# Altium PCB Sampler_4HP.PCBDOC (part 4 of 6)
Units mm, origin at the board's own origin, x right, y up, seen from the top; angles counter-clockwise.
Board outline 159.99 x 100 mm, 4 copper layers (Top, GP1(GND), L3, Bot), stack 1.648 mm thick; 546 components, 321 nets, 1657 pads, 795 vias.
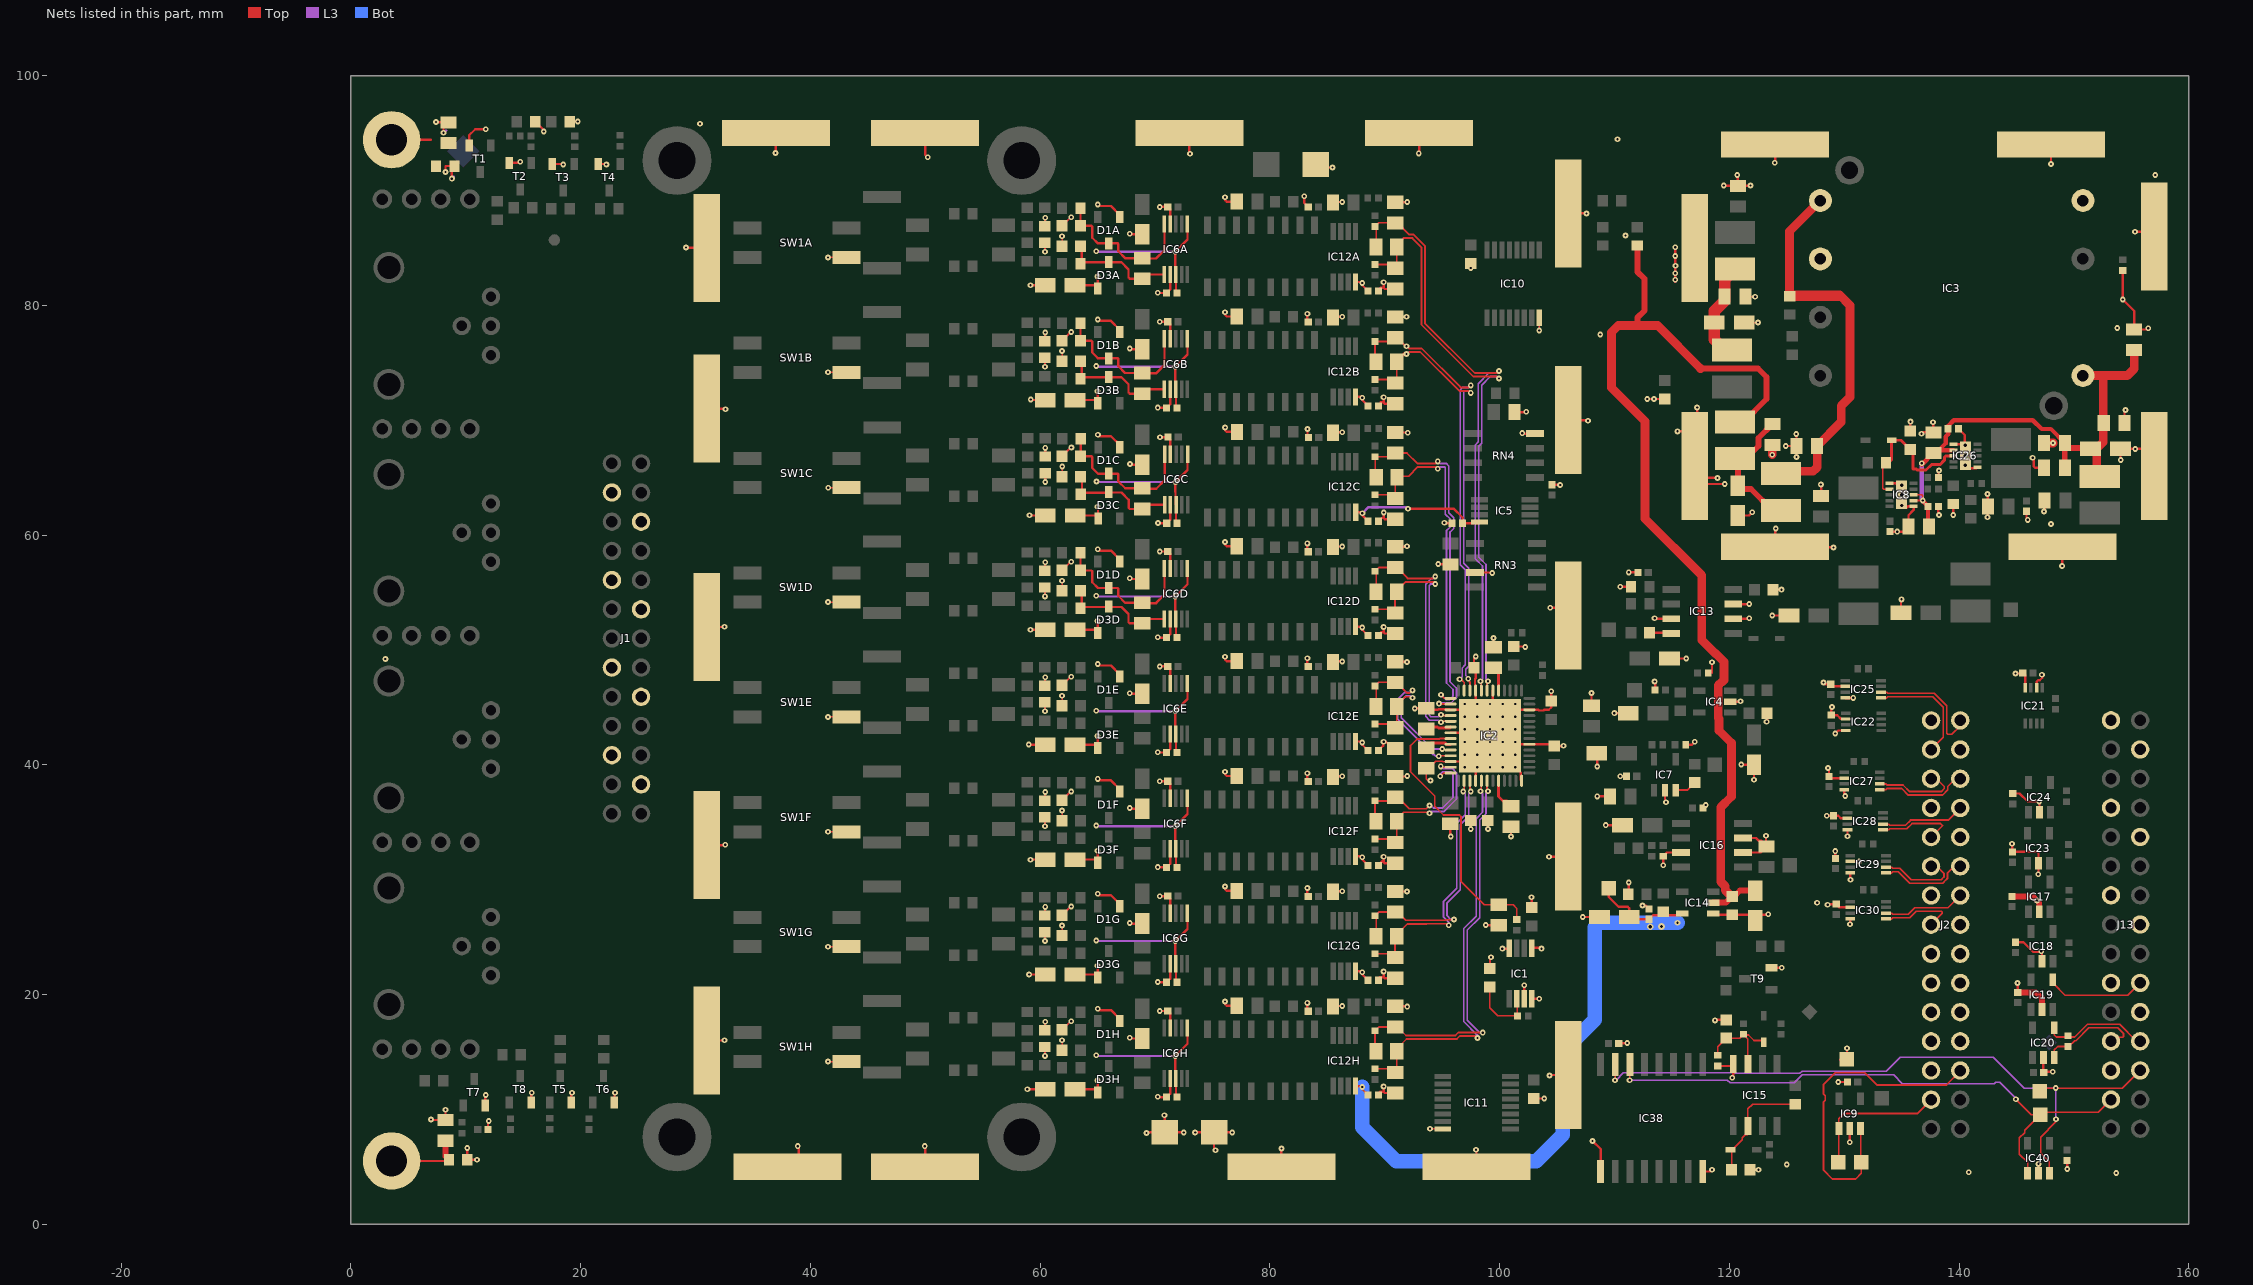
[diagram p5: the nets of this part, all layers, seen from the top]

## Via types
v1: diameter 0.5, hole 0.2, Top to Bot, tented both sides, 760 vias
v2: diameter 0.6, hole 0.3, Top to Bot, tented both sides, 15 vias
v3: diameter 1, hole 0.6, Top to Bot, tented both sides, 8 vias
v4: diameter 0.5, hole 0.2, Top to Bot, 6 vias
v5: diameter 0.6, hole 0.3, Top to Bot, 6 vias

## Nets (pads, with @x,y where several pads share a name; then routed paths per layer and width w, separated by ;. In a path a pad name is that pad's centre, name@x,y a point inside that pad or via, vN(x,y) a via of type N, cw(c..) or ccw(c..) an arc to the next point about the centre after c; other vN are vias at no path point) (continued)
EEM0_6_P: IC19.4 J13.20 | length 8.4
  Top w0.152: IC19.4@148.236,20.927 149.224,19.939 154.694,19.939 J13.20@155.77,21.015
EEM0_7_N: IC20.4 J13.24 R40.1 | length 9.3
  Top w0.152: IC20.4@148.294,17.124 148.294,16.479 148.464,16.309 150.083,16.309 151.183,17.409 153.981,17.409 155.455,15.935 J13.24@155.77,15.935
EEM0_7_P: IC20.3 J13.23 R40.2 | length 9.2
  Top w0.152: IC20.3@148.294,14.524 148.294,15.19 148.584,15.48 R40.2@149.5,15.48 149.565,15.48 150.06,15.975 150.18,15.975 151.309,17.104 153.818,17.104 154.328,16.595 154.328,16.373 154.239,16.284 153.579,16.284 J13.23@153.23,15.935
EEM1_0_N: IC25.5 J2.3 | length 10
  Top w0.152: IC25.5@133.202,45.825 133.703,45.825 133.801,45.923 137.702,45.923 138.625,45 138.625,42.384 J2.3@137.567,41.326
EEM1_0_P: IC25.6 J2.2 | length 10.6
  Top w0.152: IC25.6@133.202,46.325 133.703,46.325 133.801,46.227 137.829,46.227 138.93,45.126 138.93,42.745 139.025,42.65 139.375,42.65 140.107,43.382 J2.2@140.107,43.866
EEM1_1_N: IC27.5 J2.6 | length 8
  Top w0.152: IC27.5@133.106,37.836 133.608,37.836 133.705,37.933 135.001,37.933 135.574,37.361 138.563,37.361 139.016,37.814 139.016,38.111 139.691,38.786 J2.6@140.107,38.786
EEM1_1_P: IC27.6 J2.5 | length 7.6
  Top w0.152: IC27.6@133.106,38.336 133.608,38.336 133.705,38.238 135.127,38.238 135.7,37.666 138.436,37.666 138.711,37.941 138.711,38.111 138.036,38.786 J2.5@137.567,38.786
EEM1_2_N: IC28.5 J2.9 | length 6.9
  Top w0.152: IC28.5@133.386,34.336 133.888,34.336 133.985,34.433 135.463,34.433 135.91,34.881 138.391,34.881 138.566,34.706 J2.9@137.567,33.706
EEM1_2_P: IC28.6 J2.8 | length 7.4
  Top w0.152: IC28.6@133.386,34.836 133.888,34.836 133.985,34.738 135.336,34.738 135.784,35.186 139.046,35.186 J2.8@140.107,36.246
EEM1_3_N: IC29.5 J2.12 | length 7.8
  Top w0.152: IC29.5@133.636,30.586 134.138,30.586 134.235,30.683 134.711,30.683 135.709,29.686 138.567,29.686 138.902,30.02 138.991,30.11 138.991,30.561 139.596,31.166 J2.12@140.107,31.166
EEM1_3_P: IC29.6 J2.11 | length 7.3
  Top w0.152: IC29.6@133.636,31.086 134.138,31.086 134.235,30.988 134.838,30.988 135.835,29.991 138.441,29.991 138.686,30.236 138.686,30.561 138.081,31.166 J2.11@137.567,31.166
EEM1_4_N: IC30.5 J2.15 | length 6.7
  Top w0.152: IC30.5@133.636,26.586 134.138,26.586 134.235,26.683 135.713,26.683 136.285,27.256 138.466,27.256 138.541,27.181 138.541,27.061 J2.15@137.567,26.086
EEM1_4_P: IC30.6 J2.14 | length 7.2
  Top w0.152: IC30.6@133.636,27.086 134.138,27.086 134.235,26.988 135.586,26.988 136.159,27.561 139.041,27.561 J2.14@140.107,28.626
EEM1_5_N: J2.18
EEM1_5_P: J2.17
EEM1_6_N: J2.21
EEM1_6_P: J2.20
EEM1_7_N: J2.24
EEM1_7_P: J2.23
GND: C1.1 C2.1 C3.1 C4.1 C5.1 C6.1 C7.1 C8.1 C9.1 C10A.2 C10B.2 C10C.2 C10D.2 C10E.2 C10F.2 C10G.2 C10H.2 C11A.1 C11B.1 C11C.1 C11D.1 C11E.1 C11F.1 C11G.1 C11H.1 C12.1 C13.1 C14.1 C15.1 C16.1 C18.1 C19.1 C20.1 C21.1 C22.1 C23A.1 C23B.1 C23C.1 C23D.1 C23E.1 C23F.1 C23G.1 C23H.1 C24.1 C25A.2 C25B.2 C25C.2 C25D.2 C25E.2 C25F.2 C25G.2 C25H.2 C26.1 C27.1 C28.2 C29.1 C30.1 C31.1 C32.1 C33.1 C34.1 C35A.1 C35B.1 C35C.1 C35D.1 C35E.1 C35F.1 C35G.1 C35H.1 C36.1 C37.1 C38.1 C39.1 C40.1 C41A.1 C41B.1 C41C.1 C41D.1 C41E.1 C41F.1 C41G.1 C41H.1 C42.1 C43.1 C44.1 C45.1 C46.1 C48.1 C49.2 C50.2 C51.2 C52.1 C53.1 C54.1 C55.1 C56.2 C57.1 C58.1 C59.1 C60.2 C61.1 C62.1 C63.1 C64.1 C66.1 C67.1 C68.1 C69.1 C70A.1 C70B.1 C70C.1 C70D.1 C70E.1 C70F.1 C70G.1 C70H.1 C71A.1 C71B.1 C71C.1 C71D.1 C71E.1 C71F.1 C71G.1 C71H.1 C73A.1 C73B.1 C73C.1 C73D.1 C73E.1 C73F.1 C73G.1 C73H.1 C74A.1 C74B.1 C74C.1 C74D.1 C74E.1 C74F.1 C74G.1 C74H.1 C75.1 C76.1 C77.2 C78.2 C79.2 C85A.1 C85B.1 C85C.1 C85D.1 C85E.1 C85F.1 C85G.1 C85H.1 C88A.1 C88B.1 C88C.1 C88D.1 C88E.1 C88F.1 C88G.1 C88H.1 C94.1 C112.1 C115.2 C117.1 C118.2 C120.1 C121.1 C122.1 C123.1 C153.1 C154.1 C156.1 C157.1 C158.1 C159.1 C160.1 C161.1 C162.1 CLIP1.1 CLIP2.1 CLIP3.1 CLIP4.1 CLIP5.1 CLIP6.1 CLIP7.1 CLIP8.1 CLIP9.1 CLIP10.1 CLIP11.1 CLIP12.1 CLIP13.1 CLIP14.1 CLIP15.1 CLIP16.1 CLIP17.1 CLIP18.1 CLIP19.1 CLIP20.1 CLIP21.1 CLIP22.1 CLIP23.1 CLIP24.1 CLIP25.1 CLIP26.1 D8.2 D9.1 IC1.3 IC1.4 IC1.5 IC1.8 IC2.3 IC2.7 IC2.12 IC2.18 IC2.26 IC2.32 IC2.38 IC2.46 IC2.49 IC2.53 IC3.3 IC3.5 IC4.2 IC6A.2 IC6A.9 IC6B.2 IC6B.9 IC6C.2 IC6C.9 IC6D.2 IC6D.9 IC6E.2 IC6E.9 IC6F.2 IC6F.9 IC6G.2 IC6G.9 IC6H.2 IC6H.9 IC7.2 IC8.1 IC8.6 IC8.11 IC9.2 IC10.8 IC11.8 IC13.3 IC13.6 IC13.7 IC14.1 IC15.4 IC16.3 IC16.6 IC16.7 IC17.2 IC18.2 IC19.2 IC20.2 IC21.2 IC21.4 IC22.2 IC22.4 IC23.2 IC24.2 IC25.2 IC25.4 IC26.1 IC26.6 IC26.11 IC27.2 IC27.4 IC28.2 IC28.4 IC29.2 IC29.4 IC30.2 IC30.4 IC38.1 IC38.8 IC40.2 J1.3 J1.6 J1.9 J1.12 J1.15 J1.18 J1.21 J1.24 J2.1 J2.4 J2.7 J2.10 J2.13 J2.16 J2.19 J2.22 J2.25 J13.1 J13.4 J13.7 J13.10 J13.13 J13.16 J13.19 J13.22 J13.25 R8.1 R21.1 R27.1 R28.1 R29.1 R35A.1 R35B.1 R35C.1 R35D.1 R35E.1 R35F.1 R35G.1 R35H.1 R38.1 R43A.1 R43B.1 R43C.1 R43D.1 R43E.1 R43F.1 R43G.1 R43H.1 R48.1 R54.1 R66.2 R67.2 R75.1 R76.1 R143.1 RN3.7 RN4.4 SW1A.3 SW1B.3 SW1C.3 SW1D.3 SW1E.3 SW1F.3 SW1G.3 SW1H.3 T1.2 T2.2 T3.2 T4.2 T5.2 T6.2 T7.2 T8.2 T9.2 TP6.1 | length 460.9
  Top w0.127: v1(41.545,14.17) SW1H.3@43.142,14.17 ; v1(41.545,24.17) SW1G.3@43.142,24.17 ; v1(41.545,34.17) SW1F.3@43.142,34.17 ; v1(41.545,44.17) SW1E.3@43.142,44.17 ; v1(41.545,54.17) SW1D.3@43.142,54.17 ; v1(41.545,74.17) SW1B.3@43.142,74.17 ; v1(41.545,84.17) SW1A.3@43.142,84.17 ; v1(41.558,64.126) SW1C.3@43.155,64.126 ; C88H.1@61.918,15.14 v1(61.918,16.017) ; C88G.1@61.918,25.14 v1(61.918,26.017) ; C88F.1@61.918,35.14 v1(61.918,36.017) ; C88E.1@61.918,45.14 v1(61.918,46.017) ; C88D.1@61.918,55.14 v1(61.918,56.017) ; C88B.1@61.918,75.14 v1(61.918,76.017) ; C88A.1@61.918,85.14 v1(61.918,86.017) ; C88C.1@61.931,65.096 v1(61.931,65.973) ; v1(93.953,8.307) IC11.8@95.055,8.307 ; v1(94,38.625) 93.775,38.625 93.625,38.775 C14.1@93.625,39.686 93.836,39.686 94.452,40.302 95.057,40.302 95.078,40.281 95.741,40.281 IC2.12@95.745,40.285 ; v1(103.46,77.815) IC10.8@103.46,78.917 ; C28.2@121.3,78.5 v1(122.5,78.5) ; C27.1@121.4,80.75 v1(122.25,80.75)
  Top w0.203: v4(6.975,9.13) 7.03,9.075 C79.2@8.25,9.075 v4(8.25,9.975) ; v4(7.425,95.95) 7.45,95.925 C78.2@8.509,95.925 8.065,95.481 v4(8.065,95.027) ; v4(8.252,91.608) 8.252,92.102 8.272,92.122 R75.1@9.025,92.122 8.8,91.898 v4(8.8,91.029) ; v1(10.135,6.65) 10.152,6.633 R76.1@10.152,5.625 v1(10.991,5.625) ; T1.2@10.3,93.9 10.3,94.8 10.83,95.33 v1(11.751,95.33) ; T7.2@11.7,10.35 11.7,11.2 v1(11.75,11.25) ; C37.1@11.95,8.25 11.95,8.95 v1(12,9) ; T2.2@13.8,92.4 14.65,92.4 v1(14.75,92.5) ; T8.2@15.7,10.6 15.7,11.4 v1(15.75,11.45) ; R67.2@16.05,96 16.793,95.257 v1(16.793,95.13) ; T3.2@17.55,92.3 18.45,92.3 v1(18.5,92.25) ; R66.2@19.05,96 v1(19.75,96) ; T5.2@19.2,10.6 19.2,11.4 v1(19.25,11.45) ; T4.2@21.55,92.3 22.2,92.3 v1(22.25,92.25) ; T6.2@22.95,10.6 22.95,11.4 v1(23,11.45) ; v1(29.185,85.039) 29.224,85 CLIP6.1@31,85 ; CLIP7.1@31,16 32.5,16 v1(32.525,16.025) ; CLIP13.1@31,33 32.575,33 32.6,33.025 v1(32.6,33.05) ; CLIP14.1@31,52 32.525,52 32.55,52.025 v1(32.525,52.025) ; CLIP15.1@31,71 32.575,71 v1(32.625,70.95) ; v1(36.975,93.25) 36.975,93.289 36.9,93.364 37,93.464 CLIP26.1@37,95 ; v1(38.913,6.807) 39,6.72 CLIP21.1@39,5 ; v1(49.962,6.807) 50,6.769 CLIP25.1@50,5 ; CLIP16.1@50,95 50,93.104 v1(50.216,92.888) ; v1(58.9,11.75) C11H.1@60.45,11.75 ; v1(59.025,41.775) 59.05,41.75 C11E.1@60.45,41.75 ; v1(59.05,21.75) C11G.1@60.45,21.75 ; v1(59.075,61.725) 59.094,61.706 C11C.1@60.463,61.706 ; v1(59.175,31.725) 59.2,31.75 C11F.1@60.45,31.75 ; v1(59.175,51.75) C11D.1@60.45,51.75 ; v1(59.175,81.75) C11A.1@60.45,81.75 ; v1(59.2,71.8) 59.25,71.75 C11B.1@60.45,71.75 ; v1(60.432,14.66) R43H.1@60.432,15.432 ; R35H.1@60.432,16.88 v1@60.432,17.64 ; v1(60.432,24.66) R43G.1@60.432,25.432 ; R35G.1@60.432,26.88 v1@60.432,27.64 ; v1(60.432,34.66) R43F.1@60.432,35.432 ; R35F.1@60.432,36.88 v1@60.432,37.64 ; v1(60.432,44.66) R43E.1@60.432,45.432 ; R35E.1@60.432,46.88 v1@60.432,47.64 ; v1(60.432,54.66) R43D.1@60.432,55.432 ; R35D.1@60.432,56.88 v1@60.432,57.64 ; v1(60.432,74.66) R43B.1@60.432,75.432 ; R35B.1@60.432,76.88 v1@60.432,77.64 ; v1(60.432,84.66) R43A.1@60.432,85.432 ; R35A.1@60.432,86.88 v1@60.432,87.64 ; v1(60.445,64.616) R43C.1@60.445,65.388 ; R35C.1@60.445,66.836 v1@60.445,67.596 ; C85H.1@61.918,16.918 v1@62.668,17.668 ; C85G.1@61.918,26.918 v1@62.668,27.668 ; C85F.1@61.918,36.918 v1@62.668,37.668 ; C85E.1@61.918,46.918 v1@62.668,47.668 ; C85D.1@61.918,56.918 v1@62.668,57.668 ; C85B.1@61.918,76.918 v1@62.668,77.668 ; C85A.1@61.918,86.918 v1@62.668,87.668 ; C85C.1@61.931,66.874 v1@62.681,67.624 ; v1(67.818,16.233) 67.873,16.178 C10H.2@68.885,16.178 ; v1(67.818,26.233) 67.873,26.178 C10G.2@68.885,26.178 ; v1(67.818,36.233) 67.873,36.178 C10F.2@68.885,36.178 ; v1(67.818,46.233) 67.873,46.178 C10E.2@68.885,46.178 ; v1(67.818,56.233) 67.873,56.178 C10D.2@68.885,56.178 ; v1(67.818,76.233) 67.873,76.178 C10B.2@68.885,76.178 ; v1(67.818,86.233) 67.873,86.178 C10A.2@68.885,86.178 ; v1(67.831,66.189) 67.886,66.134 C10C.2@68.897,66.134 ; v1(70.255,11.094) 70.28,11.068 C41H.1@71.021,11.068 71.331,11.378 IC6H.2@71.331,12.687 ; v1(70.255,21.094) 70.28,21.068 C41G.1@71.021,21.068 71.331,21.378 IC6G.2@71.331,22.687 ; v1(70.255,31.094) 70.28,31.068 C41F.1@71.021,31.068 71.331,31.378 IC6F.2@71.331,32.687 ; v1(70.255,41.094) 70.28,41.068 C41E.1@71.021,41.068 71.331,41.378 IC6E.2@71.331,42.687 ; v1(70.255,51.094) 70.28,51.068 C41D.1@71.021,51.068 71.331,51.378 IC6D.2@71.331,52.687 ; v1(70.255,71.094) 70.28,71.068 C41B.1@71.021,71.068 71.331,71.378 IC6B.2@71.331,72.687 ; v1(70.255,81.094) 70.28,81.068 C41A.1@71.021,81.068 71.331,81.378 IC6A.2@71.331,82.687 ; v1(70.267,61.05) 70.293,61.024 C41C.1@71.034,61.024 71.344,61.334 IC6C.2@71.344,62.643 ; v1(70.433,18.561) 70.44,18.568 C35H.1@71.121,18.568 71.331,18.358 IC6H.9@71.331,17.087 ; v1(70.433,28.561) 70.44,28.568 C35G.1@71.121,28.568 71.331,28.358 IC6G.9@71.331,27.087 ; v1(70.433,38.561) 70.44,38.568 C35F.1@71.121,38.568 71.331,38.358 IC6F.9@71.331,37.087 ; v1(70.433,48.561) 70.44,48.568 C35E.1@71.121,48.568 71.331,48.358 IC6E.9@71.331,47.087 ; v1(70.433,58.561) 70.44,58.568 C35D.1@71.121,58.568 71.331,58.358 IC6D.9@71.331,57.087 ; v1(70.433,78.561) 70.44,78.568 C35B.1@71.121,78.568 71.331,78.358 IC6B.9@71.331,77.087 ; v1(70.433,88.561) 70.44,88.568 C35A.1@71.121,88.568 71.331,88.358 IC6A.9@71.331,87.087 ; v1(70.445,68.517) 70.452,68.524 C35C.1@71.134,68.524 71.344,68.314 IC6C.9@71.344,67.043 ; CLIP17.1@73,95 73,93.243 v1(73.05,93.193) ; v1(73.5,8) D9.1@75.15,8 ; v1(75.27,6.456) 75.15,6.576 D9.1@75.15,8 ; v1(76.1,19.4) 76.1,19.175 76.25,19.025 C73H.1@77.125,19.025 ; v1(76.1,29.4) 76.1,29.175 76.25,29.025 C73G.1@77.125,29.025 ; v1(76.1,39.4) 76.1,39.175 76.25,39.025 C73F.1@77.125,39.025 ; v1(76.1,49.4) 76.1,49.175 76.25,49.025 C73E.1@77.125,49.025 ; v1(76.1,59.4) 76.1,59.175 76.25,59.025 C73D.1@77.125,59.025 ; v1(76.1,79.4) 76.1,79.175 76.25,79.025 C73B.1@77.125,79.025 ; v1(76.1,89.4) 76.1,89.175 76.25,89.025 C73A.1@77.125,89.025 ; v1(76.113,69.356) 76.113,69.131 76.263,68.981 C73C.1@77.138,68.981 ; v1(76.725,8) D9.1@75.15,8 ; CLIP24.1@81,5 81,6.575 v1(81.025,6.6) ; v1(83,89.5) 83,88.9 C70A.1@83.35,88.55 ; v1(83.275,19.275) 83.275,18.625 C70H.1@83.35,18.55 ; v1(83.275,29.275) 83.275,28.625 C70G.1@83.35,28.55 ; v1(83.275,39.275) 83.275,38.625 C70F.1@83.35,38.55 ; v1(83.275,49.275) 83.275,48.625 C70E.1@83.35,48.55 ; v1(83.275,59.275) 83.275,58.625 C70D.1@83.35,58.55 ; v1(83.275,79.275) 83.275,78.625 C70B.1@83.35,78.55 ; v1(83.288,69.231) 83.288,68.581 C70C.1@83.363,68.506 ; D8.2@83.9,92 v1(85.469,92) ; C74H.1@85.5,18.95 85.55,19 v1(86.3,19) ; C74G.1@85.5,28.95 85.55,29 v1(86.3,29) ; C74F.1@85.5,38.95 85.55,39 v1(86.3,39) ; C74E.1@85.5,48.95 85.55,49 v1(86.3,49) ; C74D.1@85.5,58.95 85.55,59 v1(86.3,59) ; C74B.1@85.5,78.95 85.55,79 v1(86.3,79) ; C74A.1@85.5,88.95 85.55,89 v1(86.3,89) ; C74C.1@85.513,68.906 85.563,68.956 v1(86.313,68.956) ; C71H.1@89.45,11.25 89.525,11.325 89.525,11.45 89.601,11.526 89.909,11.526 ; C71G.1@89.45,21.25 89.55,21.35 89.55,21.5 89.883,21.5 89.909,21.526 ; C71F.1@89.45,31.25 89.818,31.618 89.909,31.526 ; C71D.1@89.45,51.25 89.675,51.475 89.675,51.525 89.676,51.526 89.909,51.526 ; C71B.1@89.45,71.25 89.65,71.45 89.65,71.55 89.885,71.55 89.909,71.526 ; C71A.1@89.45,81.25 89.625,81.425 89.625,81.5 89.651,81.526 89.909,81.526 ; C71C.1@89.463,61.206 89.739,61.482 89.922,61.482 ; v1@89.863,41.987 89.863,41.663 C71E.1@89.45,41.25 89.475,41.25 89.879,41.654 89.879,41.97 v1(89.909,42) 90.017,42.108 90.699,41.426 C23E.1@90.909,41.426 ; v1(89.909,12) 89.909,11.526 ; v1(89.909,22) 89.909,21.526 ; v1(89.909,32) 89.909,31.526 ; v1(89.909,52) 89.909,51.526 ; v1(89.909,72) 89.909,71.526 ; v1(89.909,82) 89.909,81.526 ; v1(89.922,61.956) 89.922,61.482 ; C23H.1@90.909,11.426 90.009,11.426 89.909,11.526 ; C25H.2@90.909,18.976 91.949,18.976 v1(91.975,18.95) ; C23G.1@90.909,21.426 90.009,21.426 89.909,21.526 ; C25G.2@90.909,28.976 91.949,28.976 v1(91.95,28.975) ; C23F.1@90.909,31.426 90.009,31.426 89.909,31.526 ; C25F.2@90.909,38.976 91.926,38.976 v1(91.975,39.025) ; C25E.2@90.909,48.976 91.924,48.976 v1(91.95,48.95) ; C23D.1@90.909,51.426 90.009,51.426 89.909,51.526 ; C25D.2@90.909,58.976 91.901,58.976 v1(91.95,59.025) ; C23B.1@90.909,71.426 90.009,71.426 89.909,71.526 ; C25B.2@90.909,78.976 91.876,78.976 v1(91.9,79) ; C23A.1@90.909,81.426 90.009,81.426 89.909,81.526 ; C25A.2@90.909,88.976 91.951,88.976 v1(91.975,89) ; C23C.1@90.922,61.382 90.022,61.382 89.922,61.482 ; C25C.2@90.922,68.932 91.968,68.932 v1(92,68.9) ; v1(92.625,44.9) 92.64,44.915 C15.1@93.625,44.915 93.755,44.785 94.647,44.785 94.702,44.84 95.69,44.84 IC2.3@95.745,44.785 96.92,44.785 IC2.53@97.92,43.785 ; v1(92.975,93.225) 93,93.25 CLIP18.1@93,95 ; v1(94.675,57.475) 94.7,57.45 C76.1@95.75,57.45 ; v1(95.2,61.075) 95.25,61.025 C22.1@95.875,61.025 ; C6.1@95.711,34.877 95.711,33.789 v1(95.75,33.75) ; IC2.12@95.745,40.285 96.92,40.285 IC2.53@97.92,41.285 ; IC2.7@95.745,42.785 IC2.53@98.92,42.785 ; C94.1@97.415,83.754 C94.1@97.5,83.669 ; v1(97.489,34.405) C54.1@97.489,35.155 ; v1(97.5,83.25) C94.1@97.5,83.669 ; C94.1@97.513,83.656 C94.1@97.5,83.669 ; RN3.7@97.875,56.74 99.335,56.74 v1(99.375,56.7) ; IC2.18@97.92,38.61 IC2.53@97.92,41.285 ; v1(97.925,49.425) 97.775,49.275 C5.1@97.775,48.45 97.92,48.305 97.92,47.528 97.865,47.473 97.865,46.515 IC2.49@97.92,46.46 IC2.53@97.92,43.785 ; v1(97.95,6.5) 98,6.45 CLIP22.1@98,5 ; v1(98.8,26.05) 98.828,26.022 C12.1@99.93,26.022 ; C3.1@98.988,35.155 98.988,34.417 v1(99,34.405) ; C1.1@99.168,22.261 99.168,23.168 v1(99.25,23.25) ; IC2.46@99.42,46.46 IC2.53@99.42,42.785 ; C16.1@99.471,50.241 v1(99.471,51.041) ; v1(100.25,24) 100.801,24 IC1.8@100.888,24.087 ; v1(101,33.75) C13.1@101,34.6 ; C4.1@101.25,50.3 102.2,50.3 v1(102.25,50.25) ; C75.1@101.3,70.7 102.275,70.7 102.3,70.725 v1(102.325,70.725) ; IC2.26@101.92,38.61 101.841,38.689 101.841,39.314 v1(101.37,39.785) v1(100.27,40.885) v1(99.17,41.985) IC2.53@99.17,42.535 ; v1(101.975,68.875) 102.02,68.83 RN4.4@103.1,68.83 ; IC1.3@102.15,19.625 v1(102.15,20.8) ; v1(102.775,28.475) 102.8,28.5 C2.1@102.8,27.569 ; IC1.4@102.8,19.625 v1(103.45,19.625) ; IC1.5@102.838,24.087 103.576,24.087 v1(103.663,24) ; C57.1@103,10.95 v1(103.9,10.95) ; v1(104.3,32) CLIP11.1@106,32 ; v1(104.35,12.95) 104.4,13 CLIP23.1@106,13 ; v1(104.425,53.675) 105.325,53.675 CLIP20.1@106,53 ; v1(104.5,46.4) C7.1@104.5,45.55 104.5,45 104.285,44.785 103.873,44.785 103.818,44.731 103.422,44.731 103.367,44.785 IC2.38@102.595,44.785 101.42,44.785 IC2.53@99.42,42.785 ; C20.1@104.575,64.375 105.25,64.375 v1(105.275,64.35) ; v1(105.575,41.65) 105.55,41.625 C8.1@104.75,41.625 104.59,41.785 IC2.32@102.595,41.785 99.92,41.785 IC2.53@99.17,42.535 ; CLIP12.1@106,70 107.65,70 v1(107.7,69.95) ; CLIP19.1@106,88 v1(107.575,88) ; v1@107.25,26.75 C52.1@108.7,26.75 ; C9.1@108,45.15 v1(108,46.25) ; v1(108.1,7.25) 108.805,6.545 IC38.1@108.805,4.6 ; C56.2@108.45,41 108.5,40.95 v1(108.5,39.85) ; v1(108.5,37.25) C53.1@109.6,37.25 ; v1(109.25,34.75) C115.2@110.7,34.75 ; v1(110,44.5) C118.2@111.2,44.5 ; C153.1@110.375,15.75 111.1,15.75 v1(111.125,15.775) ; v1(110.5,39) C55.1@111.05,39 ; v1(110.5,55.5) R143.1@111.45,55.5 ; R38.1@111.2,28.75 111.25,28.8 v1(111.25,29.75) ; v1(111.25,56.75) C30.1@112.05,56.75 ; v1(112.45,27.75) 112.7,27.75 C46.1@113,27.45 ; v1@112.825,71.875 v1(112.85,71.85) C29.1@114.375,71.85 ; v1(113.5,47.25) 113.55,47.2 C45.1@113.55,46.5 ; v1(113.5,52.75) 113.536,52.714 IC13.3@114.949,52.714 ; v1(114.25,31.25) R29.1@114.25,32.03 114.585,32.365 IC16.3@115.8,32.365 ; IC7.2@114.401,37.799 114.401,36.849 v1(114.5,36.75) ; C51.2@114.8,49.25 v1(116.25,49.25) ; v1@115.3,82.05 v1(115.3,82.225) v1(115.3,82.8) v1(115.3,84.3) v1(115.3,85.05) v1@115.375,85.125 ; v1(115.5,69.025) 117.125,69.025 116.875,68.775 CLIP10.1@116.875,66.525 ; R54.1@116.22,41.75 116.75,41.75 v1(117,42) ; CLIP10.1@116.35,64.975 CLIP10.1@117,64.975 ; CLIP10.1@116.925,65.925 CLIP10.1@117,66 ; v1(117.2,71.1) 117.2,65.825 117,65.625 CLIP10.1@117,64.975 ; IC38.8@117.695,4.6 118.35,4.6 v1(118.5,4.75) ; C62.1@117.7,36.25 117.952,36.502 v1(117.956,36.502) ; 118.5,48 v1(118.5,48.925) ; IC14.1@118.6,27.05 118.7,26.95 C44.1@120.25,26.95 123.35,26.95 v1(123.4,27) ; v1(118.75,17.75) 118.8,17.8 C68.1@119.75,17.8 ; v1(118.975,64.975) CLIP10.1@117,64.975 ; R48.1@119,13.78 120.175,13.78 IC15.4@120.345,13.95 120.345,12.845 v1(120.25,12.75) ; v1(119.525,90.425) 119.55,90.4 C26.1@120.75,90.4 ; v1(119.6,64.45) 117,64.45 CLIP10.1@117,64.975 ; IC4.2@120.1,45.5 120.95,45.5 v1(120.975,45.525) ; IC13.6@120.349,52.714 121.714,52.714 v1(121.75,52.75) ; IC13.7@120.349,53.984 121.734,53.984 v1(121.75,54) ; v1(120.7,91.35) 120.75,91.3 C26.1@120.75,90.4 ; C18.1@120.75,61.7 121.725,61.7 v1(122,61.975) ; v1(121.05,40.025) 121.075,40 C77.2@122.15,40 v1(122.15,38.7) ; IC16.6@121.2,32.365 122.715,32.365 C61.1@123.25,32.9 C61.1@123.125,33.025 ; IC16.7@121.2,33.635 122.315,33.635 122.55,33.4 122.75,33.4 C61.1@123.125,33.025 ; C66.1@121.8,4.75 v1(122.55,4.75) ; v1(121.85,90.425) 121.825,90.4 C26.1@120.75,90.4 ; v1(123.2,33.825) 123.2,33.1 C61.1@123.125,33.025 ; v1(123.25,43.75) 123.3,43.8 C117.1@123.3,44.5 ; T9.2@123.685,22.337 124.563,22.337 v1(124.575,22.325) ; v1(123.75,53) C60.2@125.2,53 ; C112.1@123.8,55.25 v1(124.55,55.25) ; v1(123.95,92.4) 124,92.45 CLIP1.1@124,94 ; v1(124.05,60.575) 124,60.525 CLIP2.1@124,59 125.4,59 125.475,58.925 v1(129.075,58.925) ; v1(124.925,67.75) C40.1@125.85,67.75 ; v1(125.825,68.8) 125.85,68.775 C40.1@125.85,67.75 ; v1(125.85,66.8) C40.1@125.85,67.75 ; v1(127.646,28) v1@127.729,27.917 ; v1(127.975,64.4) 128,64.375 C59.1@128,63.4 ; v1(128.196,47.159) 128.344,47.011 C33.1@128.837,47.011 129.023,46.825 IC25.2@130.102,46.825 ; v1(128.484,35.569) C24.1@129.084,35.569 129.484,35.569 129.717,35.336 IC28.2@130.286,35.336 ; v1(128.561,27.811) 128.619,27.869 C31.1@129.308,27.869 129.591,27.586 IC30.2@130.536,27.586 ; v1(128.586,39.726) 128.677,39.635 C38.1@128.677,38.997 128.838,38.836 IC27.2@130.006,38.836 ; v1(128.939,45.025) 128.873,44.959 C160.1@128.873,44.32 129.394,44.32 129.726,43.987 IC22.2@130.135,43.987 ; v1(129.225,42.725) 129.487,42.987 IC22.4@130.135,42.987 ; C21.1@129.232,31.858 129.232,32.482 v1(129.236,32.486) ; v1(129.486,12.386) C43.1@130.286,12.386 ; TP6.1@129.65,14.336 130.25,14.336 v1(130.25,15.325) ; IC27.4@130.006,37.836 130.006,37.366 v1(130.086,37.286) ; v1(130.286,33.786) IC28.4@130.286,34.336 ; v1(130.486,7.136) IC9.2@130.486,8.336 ; v1(130.511,26.111) 130.536,26.136 IC30.4@130.536,26.586 ; IC29.4@130.536,30.586 130.536,30.011 v1(130.561,29.986) ; IC29.2@130.536,31.586 v1(131.286,31.586) ; IC8.6@133.95,64.5 134.5,64.5 135,64 v5(135,63.5) 135,62.925 135.5,62.425 135.575,62.5 IC8.1@136.05,62.5 136.05,62.175 135.6,61.725 C64.1@135.6,60.75 135.425,60.575 135.425,60.3 v1(134.625,60.3) C58.1@134,60.3 ; C50.2@134.95,53.25 134.95,54.35 v1(135,54.4) ; C69.1@135.75,69.05 135.75,69.85 v1(135.775,69.875) ; v1(136.737,68.82) 136.853,68.936 C123.1@137.768,68.936 137.768,69.789 v1(137.737,69.82) ; C63.1@138.2,62.5 138.2,61.8 v1(138.25,61.75) ; R28.1@138.22,65 138.22,65.595 v1(138.25,65.625) ; v1(139.5,61.75) R21.1@139.5,62.7 ; IC26.1@139.502,67.895 IC26.11@140.5,67.895 ; C122.1@139.95,69.25 140.5,68.7 IC26.11@140.5,67.895 ; v5(140.552,66.07) 140.802,65.82 141.527,65.82 IC26.6@141.602,65.895 ; v5(140.552,67.82) v5(140.552,66.895) 140.5,66.946 IC26.11@140.5,67.895 ; v1(142.487,61.548) 142.507,61.568 C121.1@142.507,62.498 142.507,63.551 v1(142.487,63.57) ; v1(144.616,33.139) 144.642,33.112 C67.1@144.642,32.422 146.828,32.422 146.916,32.334 IC23.2@146.916,31.436 146.916,30.491 v1(146.9,30.475) ; C154.1@144.675,37.5 145.275,37.5 145.975,36.8 v1(146.975,36.8) 147.003,36.772 IC24.2@147.003,35.86 ; v1(144.914,47.95) 145.486,47.95 C161.1@145.543,48.007 145.757,47.793 IC21.4@145.757,46.704 ; C158.1@144.925,24.55 145.605,24.55 146.453,23.702 147.221,23.702 IC18.2@147.221,22.884 IC18.2@147.127,22.789 ; v1(145.091,21.013) 145.114,20.99 C157.1@145.114,20.193 ; C120.1@145.871,62.074 145.871,61.437 v1(145.987,61.32) ; v1(146.406,66.729) 146.503,66.631 146.503,65.968 146.609,65.862 C39.1@147.409,65.862 ; IC21.2@146.757,46.704 146.757,47.236 146.879,47.358 147.021,47.358 147.239,47.575 147.239,47.825 v1(147.214,47.85) ; IC40.2@146.914,4.459 v1(146.914,5.259) ; IC20.2@147.344,14.524 147.344,13.257 C156.1@147.377,13.225 147.436,13.284 v1(148.164,13.284) ; v1(147.403,62.042) 147.46,62.099 C48.1@147.46,62.992 ; v1(148,92.3) CLIP8.1@148,94 ; v1(148.975,57.3) 149,57.325 CLIP3.1@149,59 ; v1(149.414,4.809) C162.1@149.414,5.559 ; v1(154.075,66.525) 154.05,66.55 C49.2@154.05,67.5 156.556,67.5 157,67.056 CLIP4.1@157,66 ; R8.1@154.25,83.03 v1(154.25,80.5) 155.25,79.5 C32.1@155.25,77.9 156.586,77.9 v1(156.48,78.006) ; C34.1@154.4,69.75 154.4,70.793 v1(154.5,70.893) ; v1(155.325,86.4) 156.6,86.4 CLIP5.1@157,86 ; IC2.53@97.92,41.285 IC2.53@99.17,42.535 ; IC2.53@97.92,43.785 IC2.53@98.92,42.785 ; IC2.53@98.92,42.785 IC2.53@99.17,42.535 ; IC2.53@99.17,42.535 IC2.53@99.42,42.785
  Top w0.254: IC25.4@130.102,45.825 v1(130.8,45.825)
  Top w0.508: C159.1@144.625,28.55 146.425,28.55 v1(146.787,28.188) 146.985,27.99 IC17.2@146.985,27.195 ; C157.1@145.114,20.193 146.707,20.193 147.21,19.69 IC19.2@147.21,18.697
  Top w0.762: v1(123.75,67) C42.1@123.75,67.85 ; C36.1@147.409,68.021 v1(148.176,68.021)
  L3 w0.203: v4(8.065,95.027) 8.103,95.027 8.3,95.225 ; v4(8.8,91.029) v4@8.971,91.2 ; v1(138.25,65.625) v1@138.25,65.75
  other v1: 153.676,4.465 140.849,4.542 125.013,5.206 60.447,17.632 62.718,17.668 147.164,23.759 107.25,26.75 60.447,27.632 62.718,27.668 60.447,37.632 62.718,37.668 96.97,39.785 98.07,39.785 99.17,39.785 100.27,39.785 96.97,40.885 98.07,40.885 99.17,40.885 101.37,40.885 96.97,41.985 98.07,41.985 100.27,41.985 101.37,41.985 96.97,43.085 98.07,43.085 99.17,43.085 100.27,43.085 101.37,43.085 96.97,44.185 98.07,44.185 99.17,44.185 100.27,44.185 101.37,44.185 96.97,45.285 98.07,45.285 99.17,45.285 100.27,45.285 101.37,45.285 60.447,47.632 62.718,47.668 3.013,49.206 60.447,57.632 62.718,57.668 148.013,60.956 155.346,67.491 60.459,67.588 62.731,67.624 113.45,71.85 108.763,77.456 60.447,77.632 62.718,77.668 153.772,78.032 115.325,83.45 110.975,86.075 60.447,87.632 62.718,87.668 157.074,91.341 110.263,94.456 30.404,95.809
  other v5: 135,62.575 135,64.35
I2C0_SCL: IC38.14 IC40.1 J13.27 TP2.1 | length 51.9
  Top w0.127: v1(111.325,12.55) 111.345,12.57 IC38.14@111.345,13.9 ; v1(144.95,10.875) 146.288,9.537 146.756,9.537 146.956,9.737 152.112,9.737 J13.27@153.23,10.855 ; IC40.1@145.964,4.459 145.964,5.409 145.264,6.109 145.264,7.534 145.714,7.984 145.714,8.195 TP2.1@147.056,9.537
  L3 w0.127: v1(111.325,12.55) 119.827,12.55 120.068,12.31 125.659,12.31 126.354,13.004 134.321,13.004 135.071,12.254 143.081,12.254 143.193,12.365 143.557,12.365 144.95,10.973 v1(144.95,10.875)
I2C0_SDA: IC38.15 IC40.3 J13.26 TP1.1 | length 59.5
  Top w0.127: v1(110.05,12.55) 110.075,12.575 IC38.15@110.075,13.9 ; TP1.1@146.931,11.795 146.931,11.846 154.221,11.846 J13.26@155.77,13.395 ; IC40.3@147.864,4.459 147.864,5.434 147.114,6.184 147.114,7.589 148.439,8.914 v1(148.439,9.134)
  L3 w0.127: v1(110.05,12.55) 110.15,12.55 110.79,13.19 120.432,13.19 120.473,13.15 126.141,13.15 126.331,13.34 133.666,13.34 134.875,14.55 142.975,14.55 145.666,11.859 v1(148.414,11.859) 148.439,11.834 v1(148.439,9.134)
I2C1_SCL: IC9.1 J2.27 TP4.1 | length 12.5
  Top w0.152: TP4.1@129.486,5.386 129.536,5.436 IC9.1@129.536,8.336 129.536,9.186 129.986,9.636 136.356,9.636 J2.27@137.567,10.846
I2C1_SDA: IC9.3 J2.26 TP3.1 | length 28.6
  Top w0.152: IC9.3@131.436,8.336 131.436,5.436 TP3.1@131.486,5.386 131.486,4.436 130.986,3.936 128.986,3.936 128.211,4.711 128.211,10.665 128.359,10.813 128.359,11.188 128.211,11.336 128.211,12.186 129.211,13.186 131.786,13.186 132.836,12.136 138.911,12.136 140.107,13.331 J2.26@140.107,13.386
IN_0_N: C17A.2 C23A.2 IC2.47 R14A.2 | length 51.1
  Top w0.152: R14A.2@89.159,83.546 90.589,83.546 C23A.2@90.909,83.226 91.059,83.376 C17A.2@91.059,85.076 91.059,85.259 91.65,85.85 92.414,85.85 93.2,85.064 93.2,78.325 97.725,73.8 99.776,73.8 v1(99.95,73.626) ; IC2.47@98.92,46.46 98.92,47.199 v1(98.996,47.275)
  L3 w0.152: v1(98.996,47.275) 98.822,47.449 98.822,57.434 98.191,58.066 98.191,67.716 98.455,67.98 98.455,73.05 99.205,73.8 99.776,73.8 v1(99.95,73.626)
IN_0_P: C17A.1 C25A.1 IC2.48 R16A.2 | length 51.6
  Top w0.152: C17A.1@89.259,85.076 89.259,86.756 R16A.2@89.159,86.856 89.479,87.176 C25A.1@90.909,87.176 91.124,87.176 92.145,86.155 92.54,86.155 93.505,85.19 93.505,78.451 97.851,74.105 99.776,74.105 v1(99.95,74.279) ; v1(98.344,47.275) 98.42,47.199 IC2.48@98.42,46.46
  L3 w0.152: v1(98.344,47.275) 98.518,47.449 98.518,57.307 97.975,57.85 97.886,57.939 97.886,67.842 97.975,67.931 98.15,68.106 98.15,73.176 99.079,74.105 99.776,74.105 v1(99.95,74.279)
IN_1_N: C17B.2 C23B.2 IC2.50 R14B.2 | length 39.4
  Top w0.152: R14B.2@89.159,73.546 90.589,73.546 C23B.2@90.909,73.226 91.059,73.376 C17B.2@91.059,75.076 91.625,75.642 91.625,75.8 91.884,75.8 91.904,75.78 v1(91.904,75.754) 92.088,75.937 93.1,75.937 96.487,72.55 97.326,72.55 v1(97.5,72.376) ; v1(97.275,47.485) 97.275,47.344 97.42,47.199 IC2.50@97.42,46.46
  L3 w0.152: v1(97.275,47.485) 97.275,47.55 97.05,47.775 97.05,48.303 97.322,48.575 97.322,57.109 96.889,57.542 96.889,72.514 96.925,72.55 97.326,72.55 v1(97.5,72.376)
IN_1_P: C17B.1 C25B.1 IC2.51 R16B.2 | length 40
  Top w0.152: C17B.1@89.259,75.076 89.159,75.176 R16B.2@89.159,76.856 90.431,76.856 90.751,77.176 C25B.1@90.909,77.176 91.099,77.176 91.8,76.475 91.859,76.475 v1(91.909,76.425) 92.092,76.242 93.226,76.242 96.613,72.855 97.326,72.855 v1(97.5,73.029) ; v1(96.525,47.45) 96.669,47.45 96.796,47.322 96.796,47.287 96.92,47.164 IC2.51@96.92,46.46
  L3 w0.152: v1(96.525,47.45) 96.745,47.67 96.745,48.429 97.018,48.701 97.018,56.982 96.584,57.416 96.584,72.641 96.799,72.855 97.326,72.855 v1(97.5,73.029)
IN_2_N: C17C.2 C23C.2 IC2.1 R14C.2 | length 31.6
  Top w0.152: R14C.2@89.172,63.502 90.602,63.502 C23C.2@90.922,63.182 90.922,64.882 C17C.2@91.072,65.032 91.072,65.322 91.268,65.125 92.086,65.125 92.897,65.935 94.451,65.935 v1(94.625,65.761) ; v1(94.9,46.1) 95.2,45.8 95.2,45.785 IC2.1@95.745,45.785
  L3 w0.152: v1(94.625,65.761) 94.799,65.935 95.225,65.935 95.275,65.885 95.275,61.819 95.7,61.394 95.7,60.7 95.475,60.475 95.386,60.386 95.386,47.116 95.952,46.55 95.952,45.992 95.647,45.688 95.312,45.688 v1(94.9,46.1)
IN_2_P: C17C.1 C25C.1 IC2.2 R16C.2 | length 32.4
  Top w0.152: C17C.1@89.272,65.032 89.172,65.132 R16C.2@89.172,66.812 90.602,66.812 C25C.1@90.922,67.132 91.948,67.132 92.841,66.24 94.451,66.24 v1(94.625,66.414) ; v1(94.73,45.327) 94.884,45.327 94.926,45.285 IC2.2@95.745,45.285
  L3 w0.152: v1(94.625,66.414) 94.799,66.24 95.351,66.24 95.58,66.011 95.58,61.945 96.005,61.52 96.005,60.574 95.691,60.259 95.691,47.242 96.258,46.675 96.258,45.867 95.774,45.383 94.785,45.383 v1(94.73,45.327)
IN_3_N: C17D.2 C23D.2 IC2.4 R14D.2 | length 21.5
  Top w0.152: R14D.2@89.159,53.546 90.589,53.546 C23D.2@90.909,53.226 90.909,54.926 C17D.2@91.059,55.076 91.059,55.159 91.82,55.92 94.226,55.92 v1(94.4,55.746) ; v1(94.9,44.362) 94.976,44.285 IC2.4@95.745,44.285
  L3 w0.152: v1(94.4,55.746) 94.026,55.746 93.875,55.595 93.875,44.338 94.025,44.188 94.726,44.188 v1(94.9,44.362)
IN_3_P: C17D.1 C25D.1 IC2.5 R16D.2 | length 22.7
  Top w0.152: C17D.1@89.259,55.076 89.259,56.756 R16D.2@89.159,56.856 89.479,57.176 C25D.1@90.909,57.176 91.049,57.176 92,56.225 94.226,56.225 v1(94.4,56.399) ; v1(94.9,43.709) 94.976,43.785 IC2.5@95.745,43.785
  L3 w0.152: v1(94.4,56.399) 94.226,56.225 94.074,56.225 93.57,55.721 93.57,44.212 93.899,43.883 94.726,43.883 v1(94.9,43.709)
IN_4_N: C17E.2 C23E.2 IC2.10 R14E.2 | length 13
  Top w0.152: R14E.2@89.159,43.546 90.589,43.546 C23E.2@90.909,43.226 91.059,43.376 C17E.2@91.059,45.076 91.059,45.184 91.8,45.925 ; 91.774,45.925 91.8,45.925 ; v1(92.425,45.826) 92.326,45.925 91.8,45.925
  L3 w0.152: v1(92.425,45.826) 92.251,46 91.875,46 91.447,45.572 91.447,44.091 94.161,41.377 v1(95.005,41.377)
IN_4_P: C17E.1 C25E.1 IC2.11 R16E.2 | length 15
  Top w0.152: C17E.1@89.259,45.076 89.259,46.756 R16E.2@89.159,46.856 89.479,47.176 C25E.1@90.909,47.176 91.024,47.176 91.925,46.275 91.925,46.25 92.172,46.25 92.401,46.479 v1(92.425,46.479) ; v1(94.705,40.752) 94.738,40.785 IC2.11@95.745,40.785
  L3 w0.152: v1(92.425,46.479) 92.251,46.305 91.749,46.305 91.142,45.698 91.142,43.965 94.224,40.883 94.325,40.883 94.456,40.752 v1(94.705,40.752)
IN_5_N: C17F.2 C23F.2 IC2.13 R14F.2 | length 14.9
  Top w0.152: R14F.2@89.159,33.546 90.589,33.546 C23F.2@90.909,33.226 91.059,33.376 C17F.2@91.059,35.076 91.059,35.284 91.645,35.87 93.751,35.87 93.781,35.9 v1(93.905,35.777) ; v1(94.875,39.862) 94.951,39.785 IC2.13@95.745,39.785
  L3 w0.152: v1@93.781,35.9 93.826,35.945 95.176,35.945 96.255,37.024 96.255,39.304 95.871,39.688 95.049,39.688 v1(94.875,39.862)
IN_5_P: C17F.1 C25F.1 IC2.14 R16F.2 | length 14.2
  Top w0.152: C17F.1@89.259,35.076 89.159,35.176 R16F.2@89.159,36.856 90.589,36.856 C25F.1@90.909,37.176 91.124,37.176 92.125,36.175 93.625,36.175 v1(93.9,36.45) ; v1(94.85,39) 95.135,39.285 IC2.14@95.745,39.285
  L3 w0.152: v1(93.9,36.45) 94.05,36.45 94.25,36.25 95.05,36.25 95.95,37.15 95.95,39.178 95.745,39.383 95.049,39.383 94.85,39.184 v1(94.85,39)
IN_6_N: C17G.2 C23G.2 IC2.16 R14G.2 | length 22.6
  Top w0.152: R14G.2@89.159,23.546 90.589,23.546 C23G.2@90.909,23.226 90.909,24.926 C17G.2@91.059,25.076 91.059,25.234 91.97,26.145 93.675,26.145 93.688,26.158 95.448,26.158 v1(95.58,26.026) ; v1(96.844,37.675) 96.92,37.751 IC2.16@96.92,38.61
  L3 w0.152: v1(95.58,26.026) 95.58,26.286 95.22,26.645 95.131,26.734 95.131,28.106 95.22,28.195 96.27,29.245 96.27,34.906 97.018,35.653 97.018,37.501 v1(96.844,37.675)
IN_6_P: C17G.1 C25G.1 IC2.17 R16G.2 | length 22.5
  Top w0.152: C17G.1@89.259,25.076 89.259,26.756 R16G.2@89.159,26.856 89.479,27.176 C25G.1@90.909,27.176 91.124,27.176 91.825,26.475 93.675,26.475 93.688,26.462 95.325,26.462 95.367,26.505 96.008,26.505 v1(96.03,26.526) ; IC2.17@97.42,38.61 97.42,37.751 v1(97.496,37.675)
  L3 w0.152: v1(96.03,26.526) 95.77,26.526 95.436,26.861 95.436,27.98 96.575,29.119 96.575,34.78 97.322,35.527 97.322,37.501 v1(97.496,37.675)
IN_7_N: C17H.2 C23H.2 IC2.19 R14H.2 | length 35.2
  Top w0.152: R14H.2@89.159,13.546 90.589,13.546 C23H.2@90.909,13.226 91.059,13.376 C17H.2@91.059,15.076 91.059,15.284 91.907,16.132 96.288,16.132 96.555,16.399 97.901,16.399 v1(98.075,16.225) ; v1(98.344,37.7) 98.42,37.776 IC2.19@98.42,38.61
  L3 w0.152: v1(98.075,16.225) 98.075,16.471 96.895,17.651 96.895,25.745 97.97,26.82 97.97,35.32 98.518,35.868 98.518,37.526 v1(98.344,37.7)
IN_7_P: C17H.1 C25H.1 IC2.20 R16H.2 | length 35.2
  Top w0.152: C17H.1@89.259,15.076 89.159,15.176 R16H.2@89.159,16.856 89.479,17.176 C25H.1@90.909,17.176 90.985,17.1 91.2,17.1 91.863,16.437 96.162,16.437 96.429,16.704 98.273,16.704 98.291,16.686 v1(98.536,16.686) ; IC2.20@98.92,38.61 98.92,37.776 v1(98.996,37.7)
  L3 w0.152: v1(98.536,16.686) 98.291,16.686 97.2,17.777 97.2,25.619 98.275,26.694 98.275,35.194 98.822,35.741 98.822,37.526 v1(98.996,37.7)
N12V0A: C11A.2 C11B.2 C11C.2 C11D.2 C11E.2 C11F.2 C11G.2 C11H.2 C22.2 C41A.2 C41B.2 C41C.2 C41D.2 C41E.2 C41F.2 C41G.2 C41H.2 C46.2 C52.2 C71A.2 C71B.2 C71C.2 C71D.2 C71E.2 C71F.2 C71G.2 C71H.2 D1A.1 D1B.1 D1C.1 D1D.1 D1E.1 D1F.1 D1G.1 D1H.1 D3A.1 D3B.1 D3C.1 D3D.1 D3E.1 D3F.1 D3G.1 D3H.1 D9.2 IC5.4 IC6A.3 IC6A.6 IC6B.3 IC6B.6 IC6C.3 IC6C.6 IC6D.3 IC6D.6 IC6E.3 IC6E.6 IC6F.3 IC6F.6 IC6G.3 IC6G.6 IC6H.3 IC6H.6 IC12A.4 IC12B.4 IC12C.4 IC12D.4 IC12E.4 IC12F.4 IC12G.4 IC12H.4 IC14.5 R32.2 TP9.1 | length 240.3
  Top w0.203: C11H.2@63.05,11.75 64.765,11.75 D3H.1@65.039,11.476 65.039,12.476 v1(65,12.515) ; C11G.2@63.05,21.75 64.765,21.75 D3G.1@65.039,21.476 65.039,22.476 v1(65,22.515) ; C11F.2@63.05,31.75 64.765,31.75 D3F.1@65.039,31.476 65.039,32.476 v1(65,32.515) ; C11E.2@63.05,41.75 64.765,41.75 D3E.1@65.039,41.476 65.039,42.476 v1(65,42.515) ; C11D.2@63.05,51.75 64.765,51.75 D3D.1@65.039,51.476 65.039,52.476 v1(65,52.515) ; C11B.2@63.05,71.75 64.765,71.75 D3B.1@65.039,71.476 65.039,72.476 v1(65,72.515) ; C11A.2@63.05,81.75 64.765,81.75 D3A.1@65.039,81.476 65.039,82.476 v1(65,82.515) ; C11C.2@63.063,61.706 64.778,61.706 D3C.1@65.052,61.432 65.052,62.432 v1(65.013,62.472) ; v1(65.024,18.773) 65.151,18.646 66.167,18.646 66.939,17.874 D1H.1@66.939,17.761 ; v1(65.024,28.773) 65.151,28.646 66.167,28.646 66.939,27.874 D1G.1@66.939,27.761 ; v1(65.024,38.773) 65.151,38.646 66.167,38.646 66.939,37.874 D1F.1@66.939,37.761 ; v1(65.024,48.773) 65.151,48.646 66.167,48.646 66.939,47.874 D1E.1@66.939,47.761 ; v1(65.024,58.773) 65.151,58.646 66.167,58.646 66.939,57.874 D1D.1@66.939,57.761 ; v1(65.024,78.773) 65.151,78.646 66.167,78.646 66.939,77.874 D1B.1@66.939,77.761 ; v1(65.024,88.773) 65.151,88.646 66.167,88.646 66.939,87.874 D1A.1@66.939,87.761 ; v1(65.037,68.729) 65.164,68.602 66.18,68.602 66.952,67.83 D1C.1@66.952,67.717 ; D1H.1@66.939,17.688 D1H.1@66.939,17.761 ; D1G.1@66.939,27.688 D1G.1@66.939,27.761 ; D1F.1@66.939,37.688 D1F.1@66.939,37.761 ; D1E.1@66.939,47.688 D1E.1@66.939,47.761 ; D1D.1@66.939,57.688 D1D.1@66.939,57.761 ; D1B.1@66.939,77.688 D1B.1@66.939,77.761 ; D1A.1@66.939,87.688 D1A.1@66.939,87.761 ; D1C.1@66.952,67.644 D1C.1@66.952,67.717 ; D1H.1@67.011,17.808 66.952,17.748 D1H.1@66.939,17.761 ; D1G.1@67.011,27.808 66.952,27.748 D1G.1@66.939,27.761 ; D1F.1@67.011,37.808 66.952,37.748 D1F.1@66.939,37.761 ; D1E.1@67.011,47.808 66.952,47.748 D1E.1@66.939,47.761 ; D1D.1@67.011,57.808 66.952,57.748 D1D.1@66.939,57.761 ; D1B.1@67.011,77.808 66.952,77.748 D1B.1@66.939,77.761 ; D1A.1@67.011,87.808 66.952,87.748 D1A.1@66.939,87.761 ; D1C.1@67.024,67.764 66.964,67.705 D1C.1@66.952,67.717 ; v1(69.263,7.956) 69.306,8 D9.2@70.85,8 ; v1(70.825,9.5) 70.825,9.525 70.85,9.5 D9.2@70.85,8 ; C41H.2@71.771,11.218 C41H.2@71.831,11.158 ; C41G.2@71.771,21.218 C41G.2@71.831,21.158 ; C41F.2@71.771,31.218 C41F.2@71.831,31.158 ; C41E.2@71.771,41.218 C41E.2@71.831,41.158 ; C41D.2@71.771,51.218 C41D.2@71.831,51.158 ; C41B.2@71.771,71.218 C41B.2@71.831,71.158 ; C41A.2@71.771,81.218 C41A.2@71.831,81.158 ; C41C.2@71.784,61.174 C41C.2@71.844,61.114 ; C41H.2@71.921,11.068 C41H.2@71.831,11.158 ; C41G.2@71.921,21.068 C41G.2@71.831,21.158 ; C41F.2@71.921,31.068 C41F.2@71.831,31.158 ; C41E.2@71.921,41.068 C41E.2@71.831,41.158 ; C41D.2@71.921,51.068 C41D.2@71.831,51.158 ; C41B.2@71.921,71.068 C41B.2@71.831,71.158 ; C41A.2@71.921,81.068 C41A.2@71.831,81.158 ; C41C.2@71.934,61.024 C41C.2@71.844,61.114 ; v1(72.5,8) D9.2@70.85,8 ; IC6H.6@72.831,17.087 72.831,15.716 v1(71.771,14.656) 71.771,13.82 71.783,13.808 71.783,12.735 IC6H.3@71.831,12.687 C41H.2@71.831,11.158 ; IC6G.6@72.831,27.087 72.831,25.716 v1(71.771,24.656) 71.771,23.82 71.783,23.808 71.783,22.735 IC6G.3@71.831,22.687 C41G.2@71.831,21.158 ; IC6F.6@72.831,37.087 72.831,35.716 v1(71.771,34.656) 71.771,33.82 71.783,33.808 71.783,32.735 IC6F.3@71.831,32.687 C41F.2@71.831,31.158 ; IC6E.6@72.831,47.087 72.831,45.716 v1(71.771,44.656) 71.771,43.82 71.783,43.808 71.783,42.735 IC6E.3@71.831,42.687 C41E.2@71.831,41.158 ; IC6D.6@72.831,57.087 72.831,55.716 v1(71.771,54.656) 71.771,53.82 71.783,53.808 71.783,52.735 IC6D.3@71.831,52.687 C41D.2@71.831,51.158 ; IC6B.6@72.831,77.087 72.831,75.716 v1(71.771,74.656) 71.771,73.82 71.783,73.808 71.783,72.735 IC6B.3@71.831,72.687 C41B.2@71.831,71.158 ; IC6A.6@72.831,87.087 72.831,85.716 v1(71.771,84.656) 71.771,83.82 71.783,83.808 71.783,82.735 IC6A.3@71.831,82.687 C41A.2@71.831,81.158 ; IC6C.6@72.844,67.043 72.844,65.673 v1(71.784,64.613) 71.784,63.776 71.795,63.764 71.795,62.691 IC6C.3@71.844,62.643 C41C.2@71.844,61.114 ; IC12H.4@87.475,12.029 87.971,12.029 v1(88.05,11.95) 88.05,11.75 C71H.2@88.55,11.25 ; IC12G.4@87.475,22.029 87.971,22.029 v1(88.05,21.95) 88.05,21.75 C71G.2@88.55,21.25 ; IC12F.4@87.475,32.029 87.971,32.029 v1(88.05,31.95) 88.05,31.75 C71F.2@88.55,31.25 ; IC12E.4@87.475,42.029 87.971,42.029 v1(88.05,41.95) 88.05,41.75 C71E.2@88.55,41.25 ; IC12D.4@87.475,52.029 87.971,52.029 v1(88.05,51.95) 88.05,51.75 C71D.2@88.55,51.25 ; IC12B.4@87.475,72.029 87.971,72.029 v1(88.05,71.95) 88.05,71.75 C71B.2@88.55,71.25 ; IC12A.4@87.475,82.029 87.971,82.029 v1(88.05,81.95) 88.05,81.75 C71A.2@88.55,81.25 ; IC12C.4@87.488,61.985 87.984,61.985 v1(88.063,61.906) 88.063,61.706 C71C.2@88.563,61.206 ; v1(92.025,62.3) 96,62.3 96.8,61.5 96.775,61.475 C22.2@96.775,61.025 98.15,61.025 IC5.4@98.25,61.125 ; TP9.1@109.5,29.25 109.5,28.5 110.35,27.65 111.15,27.65 111.3,27.5 C52.2@111.3,26.75 111.5,26.55 C46.2@113,26.55 113.361,26.911 115.634,26.911 IC14.5@115.773,27.05
  L3 w0.203: v1(64.897,14.709) 64.95,14.656 v1(71.771,14.656) ; v1(64.897,24.709) 64.95,24.656 v1(71.771,24.656) ; v1(64.897,34.709) 64.95,34.656 v1(71.771,34.656) ; v1(64.897,44.709) 64.95,44.656 v1(71.771,44.656) ; v1(64.897,54.709) 64.95,54.656 v1(71.771,54.656) ; v1(64.897,74.709) 64.95,74.656 v1(71.771,74.656) ; v1(64.897,84.709) 64.95,84.656 v1(71.771,84.656) ; v1(64.91,64.665) 64.962,64.613 v1(71.784,64.613) ; v1(88.063,61.906) 88.591,62.435 91.89,62.435 v1(92.025,62.3)
  Bot w1.27: v1(88.05,11.95) 88.05,8.45 91.012,5.488 103.206,5.488 105.5,7.782 105.5,15 108.3,17.8 108.3,25.85 108.7,26.25 v1(115.5,26.25)
  other v2: 113.125,25.9 114.1,25.925
N13V0: C19.2 C44.2 IC14.2 L13.2 R6.2 | length 87.4
  Top w0.508: 112,78.25 112,78.922 112.612,79.534 112.612,82.316 112,82.928 R6.2@112,85.2 ; 117.5,74.5 122.5,74.5 123.25,73.75 123.25,71.85 121.25,69.85 L13.2@120.5,69.85 ; IC14.2@118.6,28 119.7,28 C44.2@120.25,28.55 120.442,28.55 120.942,29.05 C19.2@122.25,29.05 ; 119.108,46.992 119.108,47.119 119.312,47.323
  Top w0.762: 117.5,74.5 113.75,78.25 112,78.25 110.35,78.25 109.75,77.65 109.75,72.825 112.667,69.908 112.667,61.433 117.6,56.5 117.6,50.868 118.785,49.683 118.814,49.683 119.55,48.947 119.55,47.382 119.401,47.233 ; 119.099,46.992 119.042,46.935 119.042,44.065 119.108,43.999 119.108,42.992 120.2,41.9 120.2,37.242 119.263,36.305 119.263,29.83 119.658,29.435 119.658,29.076 120.184,28.55 C44.2@120.25,28.55
N13V0S: C40.2 IC3.4 L12.1 R19.1 | length 44.1
  Top w0.203: L12.1@124.5,65.35 127.1,65.35 127.3,65.55 127.5,65.75 127.5,67.6 C40.2@127.65,67.75 ; R19.1@125.25,80.47 129.705,80.47 130.5,79.675
  Top w0.762: L12.1@124.5,65.35 124.7,65.55 127.3,65.55 ; 127.5,65.75 127.65,65.9 C40.2@127.65,67.75 129.75,69.85 129.75,71.25 130.5,72 130.5,79.675 130.5,80 129.59,80.91 125.25,80.91 125.25,86.44 IC3.4@127.93,89.12
NetB1_1: B1.1 C78.1 R75.2 | length 3.4
  Top w0.203: B1.1@3.556,94.412 6.963,94.412
NetB2_1: B2.1 C79.1 R76.2 | length 6.8
  Top w0.203: B2.1@3.556,5.512 8.438,5.512 R76.2@8.552,5.625
  Top w0.508: C79.1@8.25,7.275 8.25,5.927 R76.2@8.552,5.625
NetC1_2: C1.2 IC1.2 R15.2 | length 6.1
  Top w0.127: C1.2@99.168,20.661 99.168,18.832 99.867,18.133 R15.2@101.568,18.133 101.538,18.163 IC1.2@101.538,19.687
NetC12_2: C12.2 IC2.8 R1.2 | length 25
  Top w0.152: IC2.8@95.745,42.285 94.796,42.285 94.75,42.24 92.816,42.24 92.25,41.674 92.25,39.391 94.353,37.288 94.353,36.397 95.12,35.63 96.521,35.63 96.64,35.511 96.64,29.86 98.678,27.822 C12.2@99.93,27.822 101.178,27.822 101.504,27.496 R1.2@101.504,26.528
NetC13_2: C13.2 IC2.22 | length 2.4
  Top w0.254: IC2.22@99.92,38.61 99.92,37.231 100.305,36.845 100.649,36.845 C13.2@100.766,36.728
NetC14_2: C14.2 IC2.9 | length 2.3
  Top w0.254: C14.2@93.625,41.486 94.02,41.881 95.304,41.881 95.4,41.785 IC2.9@95.745,41.785
NetC15_2: C15.2 IC2.6 | length 2.3
  Top w0.254: C15.2@93.625,43.115 93.795,43.285 94.611,43.285 94.691,43.205 95.665,43.205 IC2.6@95.745,43.285
NetC16_2: C16.2 IC2.45 | length 2.2
  Top w0.254: C16.2@99.471,48.441 99.92,47.991 IC2.45@99.92,46.46
NetC18_2: C18.2 C42.2 L12.2 L13.1 | length 12
  Top w0.508: L13.1@120.5,66.65 L13.1@121,66.65 ; C42.2@123.75,69.65 122.55,68.45 122.55,67.75 121.45,66.65 L13.1@121,66.65 ; L12.2@124.5,62.15 123.75,62.15 121.9,64 121.05,64 C18.2@120.75,64.3 120.75,66.4 L13.1@121,66.65
NetC27_2: C27.2 C28.1 L10.2 L11.1 | length 8.8
  Top w1.016: L11.1@120.25,76.1 119.625,76.1 118.7,77.025 C28.1@118.7,78.5 118.7,79.5 119.6,80.4 C27.2@119.6,80.75 119.6,82.25 L10.2@120.5,83.15
NetC32_2: C32.2 C34.2 C36.2 C39.2 C49.1 C63.2 C64.2 C122.2 C123.2 IC3.1 IC8.2 IC8.3 IC26.2 L6.2 | length 44.3
  Top w0.152: IC8.2@136.05,63 v1(136.84,63) 136.84,63.41 136.75,63.5 IC8.3@136.05,63.5
  Top w0.381: v1(136.75,66.25) 136.75,66.118 C123.2@137.768,67.136 138.004,67.136 C123.2@138.263,67.395 ; v1(136.84,63) 136.84,62.96 C63.2@137.3,62.5 137.3,60.85 C64.2@137.4,60.75 ; IC26.2@139.502,67.395 C123.2@138.263,67.395 ; C36.2@149.209,68.021 147.998,69.232 147.193,69.232 146.426,70 139.55,70 139.05,69.5 C122.2@139.05,69.25 139.05,68.775 138.834,68.559 138.834,67.966 C123.2@138.263,67.395
  Top w0.508: C39.2@149.209,65.862 C36.2@149.209,68.021 149.663,67.567 151.177,67.567 C49.1@151.327,67.716
  Top w0.762: IC3.1@150.79,73.88 152.552,73.88 ; L6.2@151.994,65.459 151.994,67.541 152.552,68.1 152.552,73.88 ; C32.2@155.25,76.1 155.25,74.481 154.649,73.88 152.552,73.88
  L3 w0.381: v1(136.75,66.25) 136.75,63.09 v1(136.84,63)
NetC47_1: C47.1 IC7.3 | length 1.9
  Top w0.152: IC7.3@115.351,37.799 116.349,37.799 C47.1@117,38.45
NetC65_1: C65.1 IC13.4 | length 1.9
  Top w0.203: C65.1@113.05,51.5 114.894,51.5 IC13.4@114.949,51.444
NetC66_2: C66.2 D5.2 IC15.6 R52.1 | length 10.5
  Top w0.127: C66.2@120.2,4.75 120.2,6.41 D5.2@120.11,6.5 120.275,6.5 121.134,7.36 121.134,7.532 121.393,7.791 121.565,7.791 121.615,7.84 IC15.6@121.615,8.55 121.615,10.04 122.025,10.45
  Top w0.152: 122.025,10.45 R52.1@125.75,10.45
NetC68_2: C68.2 D2.2 IC15.3 R22.2 R48.2 | length 8.1
  Top w0.152: R48.2@119,14.72 119,15.45 C68.2@119.75,16.2 120.92,16.2 R22.2@121.25,16.53 ; IC15.3@121.615,13.95 121.615,16.135 121.275,16.475 121.675,16.475 122.15,16 122.86,16 D2.2@123,15.86
NetC69_2: C69.2 D4.2 IC8.7 IC26.3 R56.1 | length 13.1
  Top w0.127: R56.1@133.8,66.25 133.35,65.8 133.35,64.086 133.436,64 IC8.7@133.95,64
  Top w0.254: R56.1@133.8,66.25 134.14,66.59 D4.2@134.14,68.25 134.95,68.25 C69.2@135.75,67.45 136,67.2 136,65.75 136.287,65.75 136.364,65.673 137.136,65.673 137.592,66.129 138.346,66.129 138.722,66.505 138.722,66.75 138.867,66.895 IC26.3@139.502,66.895
NetC72A_1: C72A.1 C88A.2 D3A.3 IC6A.1 R42A.2 | length 9.7
  Top w0.203: C88A.2@63.638,85.02 63.638,83.736 65.949,83.736 D3A.3@65.955,83.742 ; D3A.3@65.989,83.776 D3A.3@65.955,83.742 ; IC6A.1@70.831,82.687 69.261,82.687 C72A.1@68.885,82.31 67.805,82.31 67.698,82.418 67.698,83.124 67.08,83.742 D3A.3@65.955,83.742
NetC72A_2: C72A.2 C85A.2 D1A.3 IC6A.10 R34A.2 | length 13.5
  Top w0.203: R34A.2@63.518,88.442 C85A.2@63.518,86.918 64.459,86.918 64.539,86.838 64.539,85.888 65.039,85.388 D1A.3@65.989,85.388 66.758,85.388 66.802,85.344 66.802,84.709 67.401,84.11 C72A.2@68.885,84.11 68.921,84.074 70.104,84.074 70.831,84.801 IC6A.10@70.831,87.087
NetC72B_1: C72B.1 C88B.2 D3B.3 IC6B.1 R42B.2 | length 9.7
  Top w0.203: C88B.2@63.638,75.02 63.638,73.736 65.949,73.736 D3B.3@65.955,73.742 ; D3B.3@65.989,73.776 D3B.3@65.955,73.742 ; IC6B.1@70.831,72.687 69.261,72.687 C72B.1@68.885,72.31 67.805,72.31 67.698,72.418 67.698,73.124 67.08,73.742 D3B.3@65.955,73.742
NetC72B_2: C72B.2 C85B.2 D1B.3 IC6B.10 R34B.2 | length 13.5
  Top w0.203: R34B.2@63.518,78.442 C85B.2@63.518,76.918 64.459,76.918 64.539,76.838 64.539,75.888 65.039,75.388 D1B.3@65.989,75.388 66.758,75.388 66.802,75.344 66.802,74.709 67.401,74.11 C72B.2@68.885,74.11 68.921,74.074 70.104,74.074 70.831,74.801 IC6B.10@70.831,77.087
NetC72C_1: C72C.1 C88C.2 D3C.3 IC6C.1 R42C.2 | length 9.7
  Top w0.203: C88C.2@63.651,64.976 63.651,63.692 65.962,63.692 D3C.3@65.968,63.698 ; D3C.3@66.002,63.732 D3C.3@65.968,63.698 ; IC6C.1@70.844,62.643 69.274,62.643 C72C.1@68.897,62.267 67.818,62.267 67.71,62.374 67.71,63.08 67.092,63.698 D3C.3@65.968,63.698
NetC72C_2: C72C.2 C85C.2 D1C.3 IC6C.10 R34C.2 | length 13.5
  Top w0.203: R34C.2@63.531,68.398 C85C.2@63.531,66.874 64.472,66.874 64.552,66.794 64.552,65.844 65.052,65.344 D1C.3@66.002,65.344 66.771,65.344 66.815,65.3 66.815,64.665 67.413,64.067 C72C.2@68.897,64.067 68.934,64.03 70.117,64.03 70.844,64.757 IC6C.10@70.844,67.043
NetC72D_1: C72D.1 C88D.2 D3D.3 IC6D.1 R42D.2 | length 9.7
  Top w0.203: C88D.2@63.638,55.02 63.638,53.736 65.949,53.736 D3D.3@65.955,53.742 ; D3D.3@65.989,53.776 D3D.3@65.955,53.742 ; IC6D.1@70.831,52.687 69.261,52.687 C72D.1@68.885,52.31 67.805,52.31 67.698,52.418 67.698,53.124 67.08,53.742 D3D.3@65.955,53.742
NetC72D_2: C72D.2 C85D.2 D1D.3 IC6D.10 R34D.2 | length 13.5
  Top w0.203: R34D.2@63.518,58.442 C85D.2@63.518,56.918 64.459,56.918 64.539,56.838 64.539,55.888 65.039,55.388 D1D.3@65.989,55.388 66.758,55.388 66.802,55.344 66.802,54.709 67.401,54.11 C72D.2@68.885,54.11 68.921,54.074 70.104,54.074 70.831,54.801 IC6D.10@70.831,57.087